# Altium PCB 4501-WB-AV-BMS-REV-A2-ISOSPI.PcbDoc
Units mm, origin at the board's own origin, x right, y up, seen from the top; angles counter-clockwise.
Board outline 100.23 x 71.36 mm, 2 copper layers (Top Layer, Bottom Layer), stack 1.671 mm thick; 95 components, 81 nets, 303 pads, 275 vias.
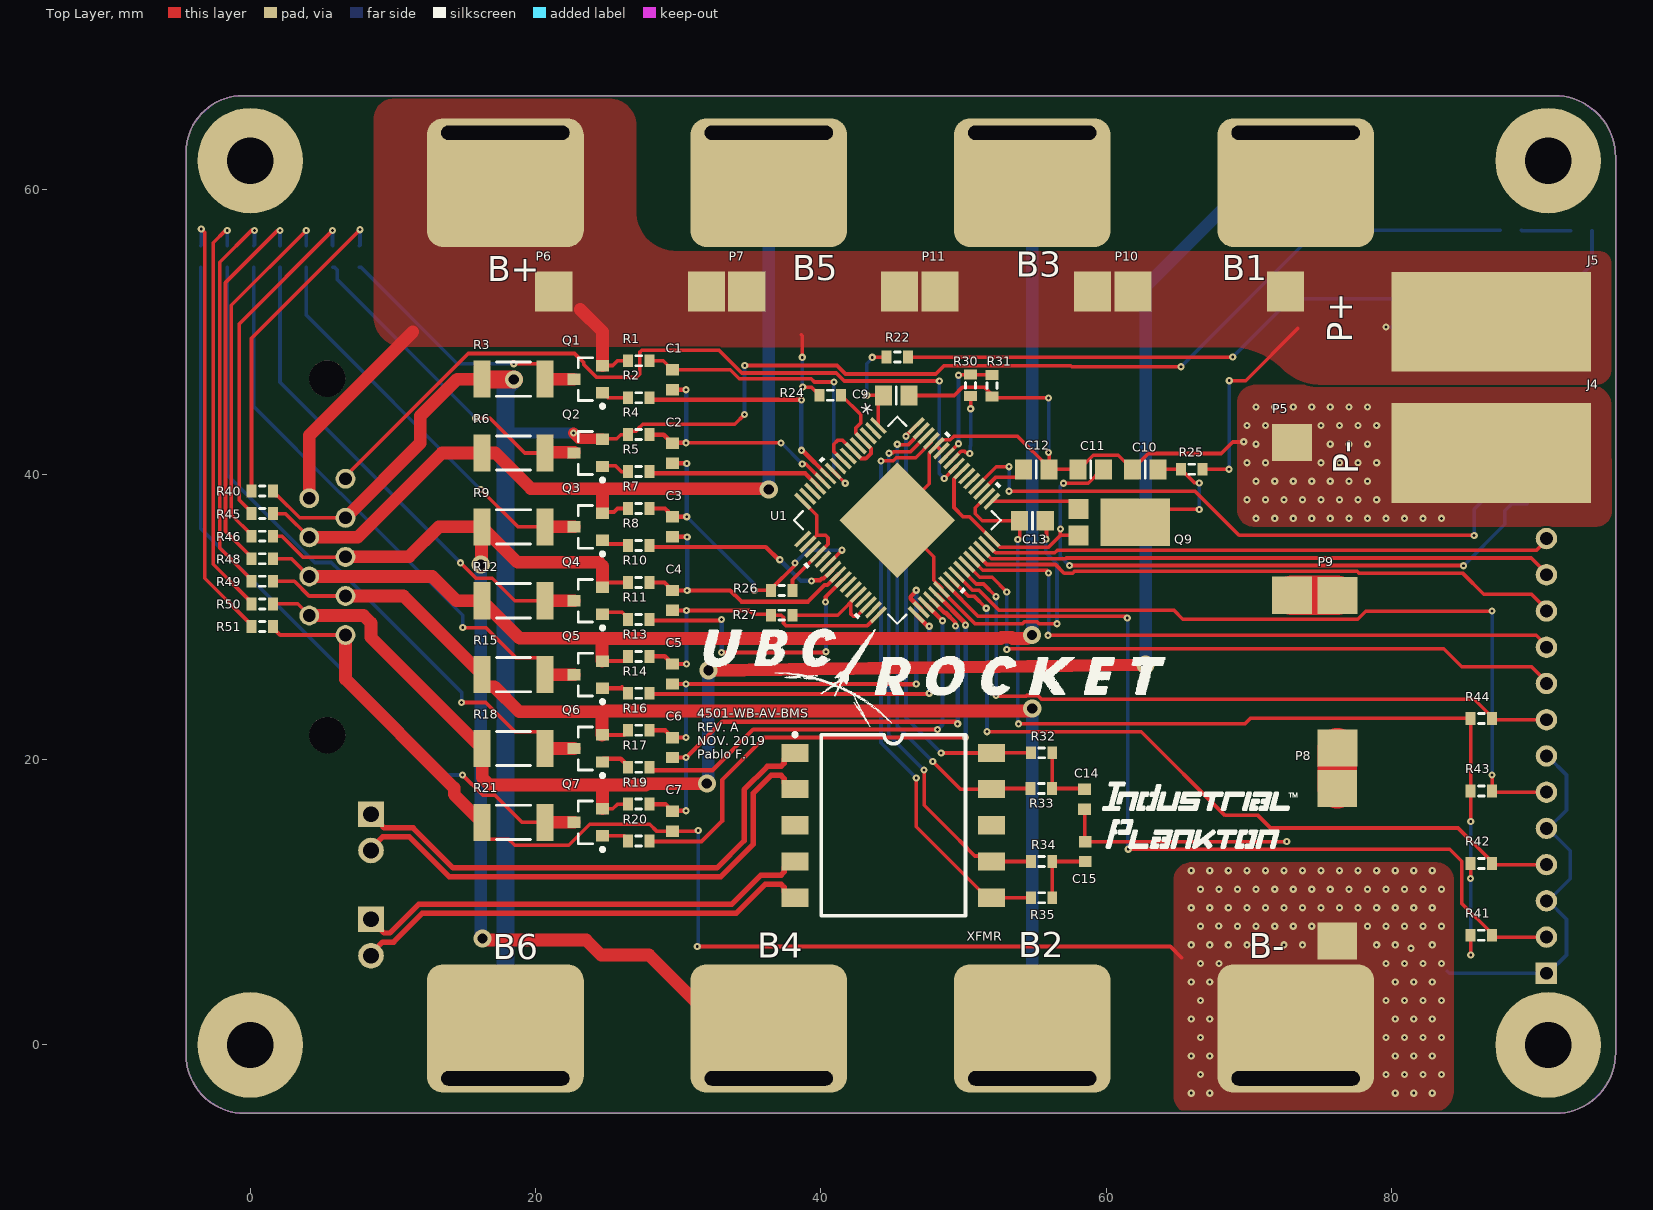
[diagram p0: Top Layer view]
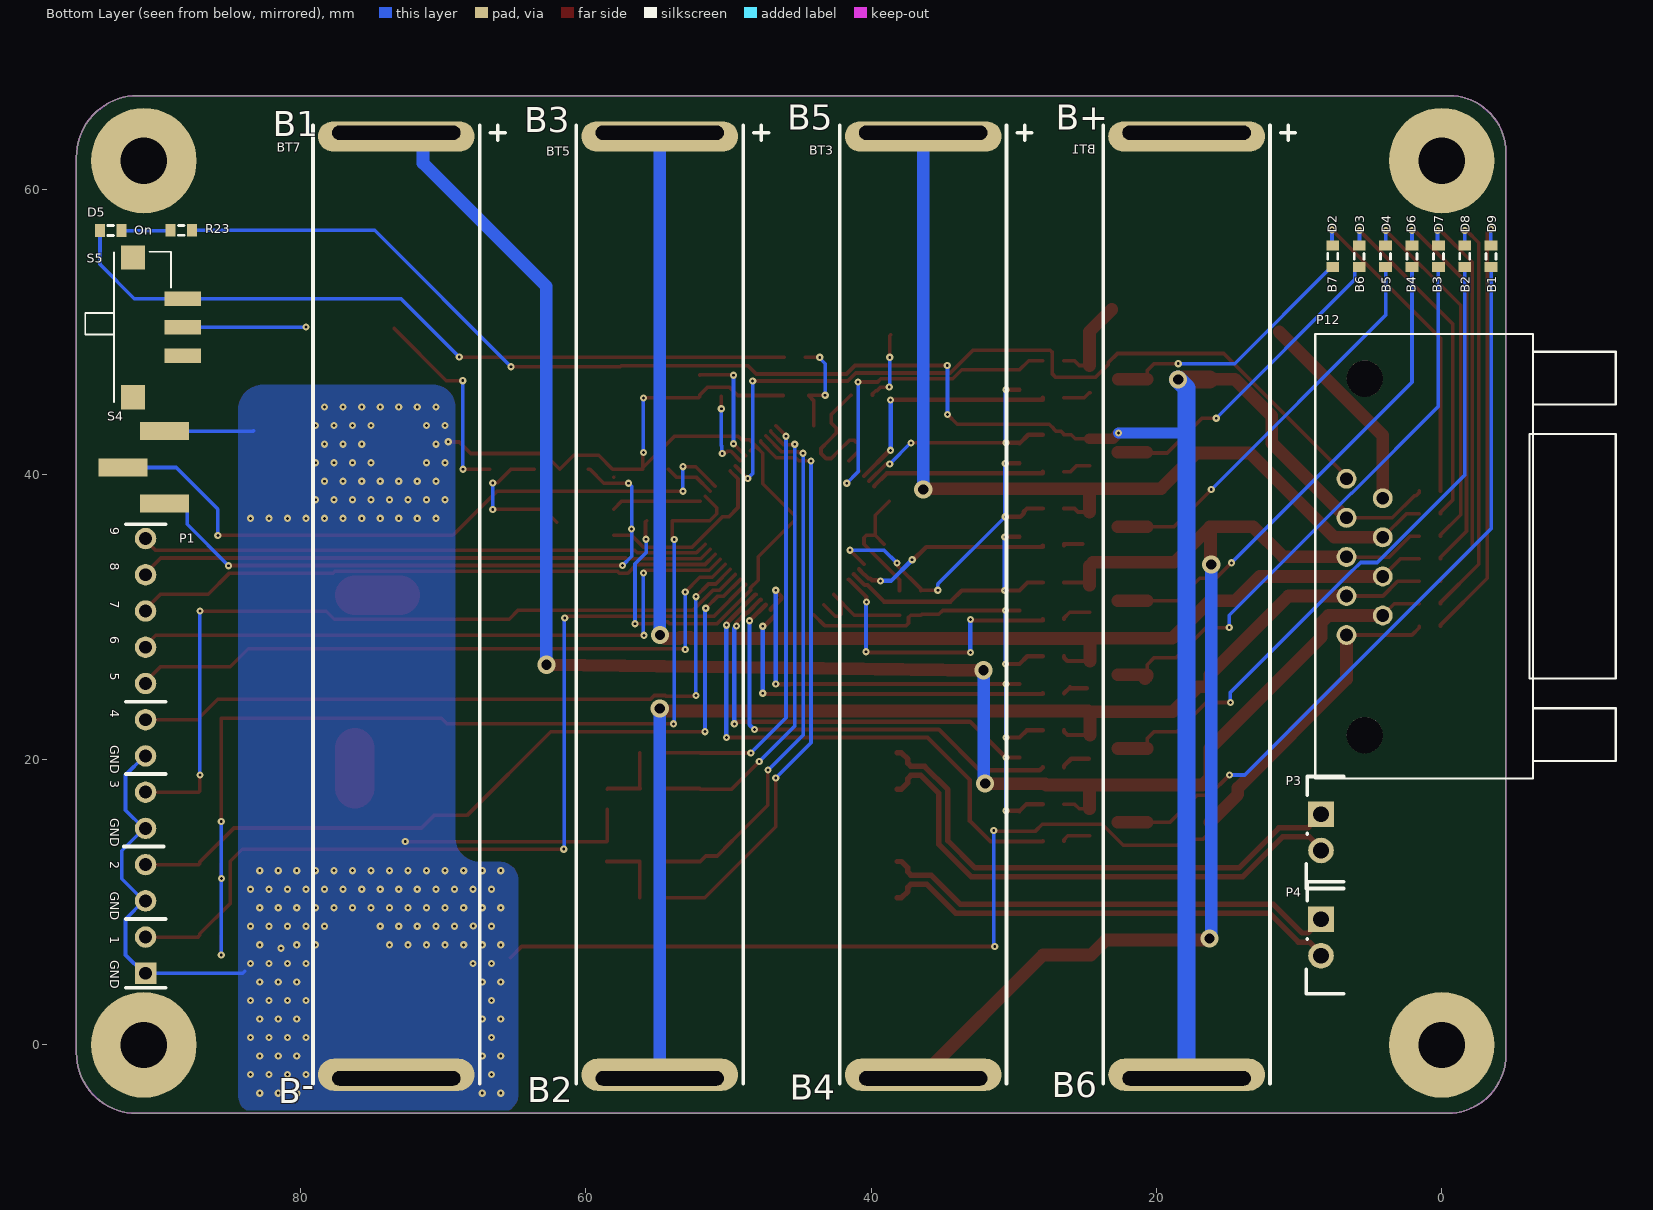
[diagram p1: Bottom Layer view, seen from below]

## Layer stack, top to bottom
Top Solder: solder mask 0.0102, Solder Resist, Dk 3.5
Top Layer: signal copper 0.0356
Dielectric 1: dielectric 1.6, FR-4, Dk 4.8
Bottom Layer: signal copper 0.0356
Bottom Solder: solder mask 0.0102, Solder Resist, Dk 3.5

## Board outline
-0.386,-4.8 91.479,-4.8 ccw(c91.479,-0.551) 95.728,-0.551 95.728,62.238 ccw(c91.401,62.238) 91.401,66.564 -0.49,66.564 ccw(c-0.49,62.555) -4.5,62.555 -4.5,-0.687 ccw(c-0.386,-0.687)

## Design rules (kind name [scope] priority, off if disabled: settings)
Clearance [All] p1: gap=0.152 ignorepadtopadclearanceinfootprint=FALSE except(0: Arc-Hole Track-Hole SMDPad-Hole THPad-Hole Via-Hole Fill-Hole Poly-Hole Region-Hole Text-Hole)
ComponentClearance [All] p1: gap=0 collisioncheckmode=3 verticalgap=0.003 showdistances=FALSE
DiffPairsRouting [All] p1: maxlimit=0.254 minlimit=0.254 mostfreqgap=0.254 toplayer_minwidth=0.381 toplayer_maxwidth=0.381 toplayer_prefwidth=0.381 bottomlayer_minwidth=0.381 bottomlayer_maxwidth=0.381 bottomlayer_prefwidth=0.381 maxuncoupledlength=12.7
HoleSize [All] p1: absolutevalues=TRUE maxlimit=25.4 minlimit=0.025 maxpercent=80.000 minpercent=20.000
HoleToHoleClearance [All] p1: gap=0.2 allowstackedmicrovias=TRUE
MinimumSolderMaskSliver [All] p1: minsoldermaskwidth=0.025
PolygonConnect [All] p1: connectstyle=Direct reliefconductorwidth=0.254 reliefentries=4 polygonreliefangle="90 Angle" airgapwidth=0.254
RoomDefinition 4501-WB-AV-BMS-REV-A2-ISOSPI [InComponentClass('4501-WB-AV-BMS-REV-A2-ISOSPI')] p1: confinementstyle=ConfineIn formatcopy=TRUE lockcomponents=FALSE outline -18.527,-5.045 97.45,-5.045 97.45,69.629 -18.527,69.629
RoutingVias [All] p1: holewidth=0.2 width=0.505 viastyle="Through Hole" minholewidth=0.2 minwidth=0.505 maxholewidth=0.711 maxwidth=1.27
SilkToSilkClearance [All] p1: silktosilkclearance=0.025
SilkToSolderMaskClearance [IsPad] p1: minsilkscreentomaskgap=0.025 clearancetoexposedcopper=TRUE
SolderMaskExpansion [All] p1: expansion=0.102 istentingtop=FALSE
Width [All] p1: maxlimit=2.794 minlimit=0.254 preferedwidth=0.305
23 further rules are at their usual default settings.

## Classes and differential pairs
differential pair IB: +IB_P -IB_N
differential pair IA: +IA_P -IA_N

## Components (designator, comment, footprint, x,y, rotation, side; value= is the part's Value field where it differs from the comment)
BT1 "Battery" PCBComponent_1#1 17.883,-2.342 r90 bottom locked
BT3 "Battery" PCBComponent_1#1 36.354,-2.342 r90 bottom locked
BT5 "Battery" PCBComponent_1#1 54.825,-2.342 r90 bottom locked
BT7 "Battery" PCBComponent_1#1 73.296,-2.342 r90 bottom locked
C1 "399-1092-1-ND" 1608[0603] 29.601,46.632 r90 top value=10nF
C2 "399-1092-1-ND" 1608[0603] 29.601,41.476 r90 top value=10nF
C3 "399-1092-1-ND" 1608[0603] 29.601,36.32 r90 top value=10nF
C4 "399-1092-1-ND" 1608[0603] 29.601,31.164 r90 top value=10nF
C5 "399-1092-1-ND" 1608[0603] 29.601,26.008 r90 top value=10nF
C6 "399-1092-1-ND" 1608[0603] 29.601,20.851 r90 top value=10nF
C7 "399-1092-1-ND" 1608[0603] 29.601,15.695 r90 top value=10nF
C9 "1276-1090-1-ND" 6-0805_N 45.286,45.53 r180 top value=100nF
C10 "1276-1090-1-ND" 6-0805_N 62.744,40.361 r0 top value=100nF
C11 "311-3498-1-ND" 6-0805_N 58.927,40.361 r0 top value=1uF
C12 "311-3498-1-ND" 6-0805_N 55.11,40.361 r180 top value=1uF
C13 "311-3498-1-ND" 6-0805_N 54.836,36.752 r180 top value=1uF
C14 "399-1092-1-ND" 1608[0603] 58.499,17.235 r90 top value=10nF
C15 "399-1092-1-ND" 1608[0603] 58.542,13.561 r270 top value=10nF
D2 "160-1435-1-ND" J1-0603 7.64,55.288 r90 bottom
D3 "160-1435-1-ND" J1-0603 5.79,55.288 r90 bottom
D4 "160-1435-1-ND" J1-0603 3.939,55.288 r90 bottom
D5 "LED0" J1-0603 93.322,57.096 r180 bottom
D6 "160-1435-1-ND" J1-0603 2.088,55.288 r90 bottom
D7 "160-1435-1-ND" J1-0603 0.238,55.288 r90 bottom
D8 "160-1435-1-ND" J1-0603 -1.613,55.288 r90 bottom
D9 "160-1435-1-ND" J1-0603 -3.464,55.288 r90 bottom
J4 "Socket" PCBComponent_1#2 81.712,42.086 r180 top
J5 "Socket" PCBComponent_1#3 81.712,50.699 r180 top
P1 "Header 13" DIP10 90.873,5.024 r0 bottom
P3 "WM4900-ND" WM4900-ND 9.99,8.402 r180 bottom
P4 "WM4900-ND" WM4900-ND 9.99,1.028 r180 bottom
P5 "36-5104-ND" PCBComponent_1#4 73.025,31.53 r90 top
P6 "36-5104-ND" PCBComponent_1#4 31.976,52.825 r180 top
P7 "36-5104-ND" PCBComponent_1#4 45.511,52.825 r180 top
P8 "36-5104-ND" PCBComponent_1#4 76.21,7.279 r90 top
P9 "36-5104-ND" PCBComponent_1#4 76.213,20.817 r90 top
P10 "36-5104-ND" PCBComponent_1#4 72.579,52.825 r180 top
P11 "36-5104-ND" PCBComponent_1#4 59.045,52.825 r180 top
P12 "3-338168-2" CONN_3-338168-2 27.338,39.699 r90 bottom
Q1 "BSS308PEH6327XTSA1CT-ND" SOT95P245X110-3N 23.697,46.682 r180 top
Q2 "BSS308PEH6327XTSA1CT-ND" SOT95P245X110-3N 23.697,41.503 r180 top
Q3 "BSS308PEH6327XTSA1CT-ND" SOT95P245X110-3N 23.697,36.324 r180 top
Q4 "BSS308PEH6327XTSA1CT-ND" SOT95P245X110-3N 23.697,31.145 r180 top
Q5 "BSS308PEH6327XTSA1CT-ND" SOT95P245X110-3N 23.697,25.966 r180 top
Q6 "BSS308PEH6327XTSA1CT-ND" SOT95P245X110-3N 23.697,20.787 r180 top
Q7 "BSS308PEH6327XTSA1CT-ND" SOT95P245X110-3N 23.697,15.608 r180 top
Q9 "DXT5551P5-13CT-ND" DXT5551P5-13 62.042,36.648 r270 top
R1 "A129676CT-ND" J1-0603 27.231,47.97 r0 top value=100
R2 "A129543CT-ND" J1-0603 27.231,45.38 r0 top value=3.3k
R3 "A130642CT-ND" 12Z-2010 18.454,46.682 r180 top value=33
R4 "A129676CT-ND" J1-0603 27.231,42.789 r0 top value=100
R5 "A129543CT-ND" J1-0603 27.231,40.199 r0 top value=3.3k
R6 "A130642CT-ND" 12Z-2010 18.454,41.503 r180 top value=33
R7 "A129676CT-ND" J1-0603 27.231,37.608 r0 top value=100
R8 "A129543CT-ND" J1-0603 27.231,35.018 r0 top value=3.3k
R9 "A130642CT-ND" 12Z-2010 18.454,36.324 r180 top value=33
R10 "A129676CT-ND" J1-0603 27.231,32.427 r0 top value=100
R11 "A129543CT-ND" J1-0603 27.231,29.837 r0 top value=3.3k
R12 "A130642CT-ND" 12Z-2010 18.454,31.145 r180 top value=33
R13 "A129676CT-ND" J1-0603 27.231,27.246 r0 top value=100
R14 "A129543CT-ND" J1-0603 27.231,24.656 r0 top value=3.3k
R15 "A130642CT-ND" 12Z-2010 18.454,25.966 r180 top value=33
R16 "A129676CT-ND" J1-0603 27.231,22.065 r0 top value=100
R17 "A129543CT-ND" J1-0603 27.231,19.475 r0 top value=3.3k
R18 "A130642CT-ND" 12Z-2010 18.454,20.787 r180 top value=33
R19 "A129676CT-ND" J1-0603 27.231,16.884 r0 top value=100
R20 "A129543CT-ND" J1-0603 27.231,14.294 r0 top value=3.3k
R21 "A130642CT-ND" 12Z-2010 18.454,15.608 r180 top value=33
R22 "A129676CT-ND" J1-0603 45.367,48.227 r0 top value=100
R23 "RMCF2010JT33R0CT-ND" J1-0603 88.374,57.113 r180 bottom value=475
R24 "A129676CT-ND" J1-0603 40.663,45.55 r0 top value=100
R25 "A129676CT-ND" J1-0603 66.01,40.361 r0 top value=100
R26 "A129676CT-ND" J1-0603 37.266,31.865 r0 top value=100
R27 "A129676CT-ND" J1-0603 37.266,30.133 r0 top value=100
R30 "RNCP0603FTD1K00CT-ND" J1-0603 50.508,46.244 r90 top value=1k
R31 "RNCP0603FTD1K00CT-ND" J1-0603 52.01,46.223 r270 top value=1k
R32 "311-2598-1-ND" J1-0603 55.477,20.482 r0 top value=50
R33 "311-2598-1-ND" J1-0603 55.462,17.979 r180 top value=50
R34 "311-2598-1-ND" J1-0603 55.477,12.862 r0 top value=50
R35 "311-2598-1-ND" J1-0603 55.477,10.322 r180 top value=50
R40 "RMCF2010JT33R0CT-ND" J1-0603 0.838,38.834 r180 top value=475
R41 "RNCP0603FTD10K0CT-ND" J1-0603 86.316,7.69 r0 top value=10k
R42 "RNCP0603FTD10K0CT-ND" J1-0603 86.316,12.725 r0 top value=10k
R43 "RNCP0603FTD10K0CT-ND" J1-0603 86.316,17.805 r0 top value=10k
R44 "RNCP0603FTD10K0CT-ND" J1-0603 86.316,22.885 r0 top value=10k
R45 "RMCF2010JT33R0CT-ND" J1-0603 0.838,37.252 r180 top value=475
R46 "RMCF2010JT33R0CT-ND" J1-0603 0.838,35.671 r180 top value=475
R48 "RMCF2010JT33R0CT-ND" J1-0603 0.838,34.089 r180 top value=475
R49 "RMCF2010JT33R0CT-ND" J1-0603 0.838,32.507 r180 top value=475
R50 "RMCF2010JT33R0CT-ND" J1-0603 0.838,30.926 r180 top value=475
R51 "RMCF2010JT33R0CT-ND" J1-0603 0.838,29.344 r180 top value=475
S4 "S9337-ND, SAM8981-ND" *TSM-103-01-L-SV 91,40.492 r270 bottom
S5 "SS312SAH4-R" *SW_SS312SAH4-R 89.797,50.315 r180 bottom
U1 "LTC6812ILWE-1#3ZZPBF-ND" "LQFP64_LWE_A - duplicate" 45.367,36.792 r315 top value=Value
XFMR "1840-1032-1-ND" HM2100NLT 38.191,20.482 r0 top

## Footprints (in the part's own frame and the unit in brackets; to place one, negate y for a bottom-side part, rotate by r counter-clockwise, add the part's x,y. Pads: shape width x height; smd on the part's side, far side on the other; paste and mask are expansions set on the pad)
6-0805_N [mm] "Chip Resistor, Body 2.0x1.2mm, IPC Medium Density"
  rect 1.2x1.4 smd: 1(-0.9,0) 2(0.9,0)
  silkscreen extent 0,-0.6 0,0.6, body extent -1.07,-0.7 1.07,0.7, height 0.7
12Z-2010 [mm] "Chip Resistor, Body 5.0x2.5mm, IPC High Density"
  rect 1.2x2.6 smd: 1(-2.2,0) 2(2.2,0)
  silkscreen extent -1.2,-1.2 1.2,1.2, body extent -2.58,-1.33 2.58,1.33, height 0.9
1608[0603] [mm] "Chip Capacitor, Body 1.6x0.8mm, IPC High Density"
  rect 0.8x0.9 smd: 1(-0.7,0) 2(0.7,0)
  body extent -0.87,-0.48 0.87,0.48, height 1.3
*SW_SS312SAH4-R [mm]
  rect 2.55x1 smd: 1(1.525,-2) 2(1.525,0) 3(1.525,2)
  rect 1.7x1.7 smd: P$1(-1.95,-4.9) P$2(-1.95,4.9)
  silkscreen extent -5.3,-5.25 0.7,5.3, body extent -5.27,-5.25 2.12,5.25, height 3.1
*TSM-103-01-L-SV [mm]
  rect 1.27x3.43 smd: 1(-2.54,1.46) 2(0,-1.46) 3(2.54,1.46)
  body extent -3.94,-2.64 3.68,2.64, height 9.78
CONN_3-338168-2 [mil]
  round 55 hole 35: 1(-431.5,-813.39) 2(-377.56,-913.39) 3(-323.62,-813.39) 4(-269.69,-913.39) 5(-215.75,-813.39) 6(-161.81,-913.39) 7(-107.87,-813.39) 8(-53.94,-913.39) 9(0,-813.39)
  round 100 hole 100: 10(-707.75,-863.69) 11(276.25,-863.69)
  silkscreen extent -828,-1556 399,-727, body extent -827,-1569 397,-730, height 67
DIP10 [mm]
  rect 1.5x1.5 hole 0.9: 1(0,0)
  round 1.5 hole 0.9: 2(0,-2.54) 3(0,-5.08) 4(0,-7.62) 5(0,-10.16) 6(0,-12.7) 7(0,-15.24) 8(0,-17.78) 9(0,-20.32) 10(0,-22.86) 11(0,-25.4) 12(0,-27.94) 13(0,-30.48)
  silkscreen extent -1.4,-31.5 1.52,1.02
DXT5551P5-13 [mm]
  rect 1.4x1.39 smd: 1(0.92,-3.982) 2(-0.92,-3.982)
  rect 3.36x4.86 smd: 3(0,0)
HM2100NLT [mm]
  rect 1.89x1.27 smd: 1(0,0) 2(0,-2.54) 3(0,-5.08) 4(0,-7.62) 5(0,-10.16) 6(13.79,0) 7(13.79,-2.54) 8(13.79,-5.08) 9(13.79,-7.62) 10(13.79,-10.16)
  silkscreen extent -0.13,-11.43 11.96,1.4, body extent -0.5,-12.3 14.47,2.4, height 3.3
J1-0603 [mm] "Chip Resistor, Body 1.6x0.8mm, IPC High Density"
  rect 0.7x0.9 smd: 1(-0.75,0) 2(0.75,0)
  silkscreen extent -0.2,-0.35 0.2,0.35, body extent -0.85,-0.48 0.85,0.48, height 0.9
"LQFP64_LWE_A - duplicate" [mm]
  rect 1.461x0.27 smd paste+0 mask+0: 1(-5.625,3.75) 2(-5.625,3.25) 3(-5.625,2.75) 4(-5.625,2.25) 5(-5.625,1.75) 6(-5.625,1.25) 7(-5.625,0.75) 8(-5.625,0.25) 9(-5.625,-0.25) 10(-5.625,-0.75) 11(-5.625,-1.25) 12(-5.625,-1.75) 13(-5.625,-2.25) 14(-5.625,-2.75) 15(-5.625,-3.25) 16(-5.625,-3.75) 33(5.625,-3.75) 34(5.625,-3.25) 35(5.625,-2.75) 36(5.625,-2.25) 37(5.625,-1.75) 38(5.625,-1.25) 39(5.625,-0.75) 40(5.625,-0.25) 41(5.625,0.25) 42(5.625,0.75) 43(5.625,1.25) 44(5.625,1.75) 45(5.625,2.25) 46(5.625,2.75) 47(5.625,3.25) 48(5.625,3.75)
  rect 0.27x1.461 smd paste+0 mask+0: 17(-3.75,-5.625) 18(-3.25,-5.625) 19(-2.75,-5.625) 20(-2.25,-5.625) 21(-1.75,-5.625) 22(-1.25,-5.625) 23(-0.75,-5.625) 24(-0.25,-5.625) 25(0.25,-5.625) 26(0.75,-5.625) 27(1.25,-5.625) 28(1.75,-5.625) 29(2.25,-5.625) 30(2.75,-5.625) 31(3.25,-5.625) 32(3.75,-5.625) 49(3.75,5.625) 50(3.25,5.625) 51(2.75,5.625) 52(2.25,5.625) 53(1.75,5.625) 54(1.25,5.625) 55(0.75,5.625) 56(0.25,5.625) 57(-0.25,5.625) 58(-0.75,5.625) 59(-1.25,5.625) 60(-1.75,5.625) 61(-2.25,5.625) 62(-2.75,5.625) 63(-3.25,5.625) 64(-3.75,5.625)
  rect 5.74x5.74 smd paste-2.857 mask+0: 65(0,0)
  silkscreen extent -6.86,-6.86 6.86,6.86, body extent 0,0 0.25,0.25, height 0.25
PCBComponent_1#1 [mm]
  rrect100% 2.125x11 / inner rrect25% 0x0 / far side rrect0% 0x0 all layers, no hole: 1(66.04,0)
  rrect0% 0x0 / inner rrect0% 0x0 / far side rrect25% 9x11 hole 9 slot 1 at 0 deg copper offset -3.5,0: 1(66.294,0)
  rrect25% 0x0 / inner rrect25% 0x0 / far side rrect25% 9x11 hole 9 slot 1 at 0 deg copper offset 3.5,0: 2(0,0)
  rrect100% 2.25x11 / inner rrect25% 0x0 / far side rrect0% 0x0 all layers, no hole: 2(0.254,0)
  silkscreen extent -0.38,-7.62 66.8,5.84, body extent 0.63,-9.2 65.63,9.2, height 18.6
PCBComponent_1#2 [mm]
  rect 14x7 smd: 1(-5.288,0.586)
PCBComponent_1#3 [mm]
  rect 14x7 smd: 1(-5.288,0)
PCBComponent_1#4 [mm]
  rect 2.6x2.8 smd: 1(0,0) 2(10.7,0)
  body extent -0.94,-1.15 11.36,1.15, height 1.8
SOT95P245X110-3N [mm] "SOT23, 3-Leads, Body 2.90x2.45mm, Pitch 0.95mm, IPC Medium Density"
  rect 0.9x0.8 smd: 1(-1,0.95) 2(-1,-0.95) 3(1,0)
  silkscreen extent -1.13,-1.5 0.7,2.02, body extent -0.7,-1.5 0.7,1.5, height 1.1
WM4900-ND [mm]
  rect 1.79x1.79 hole 1.09: 1(1.524,7.772)
  round 1.79 hole 1.09: 2(1.524,5.232)
  silkscreen extent 0.48,2.57 3.1,10.42, body extent 0.89,2.84 14.48,10.21, height 7.11

## Part data
BT1 BT3 BT5 BT7: "Multicell Battery", LatestRevisionDate=17-Jul-2002, LatestRevisionNote="Re-released for DXP Platform.", PackageDescription="Battery; 2 Leads", PackageReference=BAT-2, Published=24-Mar-1999, Publisher="Altium Limited"
C1 C2 C3 C4 C5 C6 C7 C9 C10 C11 C12 C13 C14 C15: library part "Cap Semi", "Capacitor (Semiconductor SIM Model)", LatestRevisionDate=29-May-2009, LatestRevisionNote="IPC-7351 Footprint Added.", PackageDescription="Chip Capacitor", PackageReference=C1206, Published=8-Jun-2000, Publisher="Altium Limited"
  C1 C2 C3 C4 C5 C6 C7 C14 C15: SPN=399-1092-1-ND
  C9 C10: SPN=1276-1090-1-ND
  C11 C12 C13: SPN=311-3498-1-ND
D2 D3 D4 D6 D7 D8 D9: library part LED0, "Typical INFRARED GaAs LED", LatestRevisionDate=08-Jul-2005, LatestRevisionNote="Mech Layer 1 removed.", PackageDescription="LED; 2 Leads", PackageReference=LED-0, Published=8-Jun-2000, Publisher="Altium Limited", SPN=160-1435-1-ND
D5: "Typical INFRARED GaAs LED", LatestRevisionDate=08-Jul-2005, LatestRevisionNote="Mech Layer 1 removed.", PackageDescription="LED; 2 Leads", PackageReference=LED-0, Published=8-Jun-2000, Publisher="Altium Limited", SPN=160-1646-1-ND
P1: "Header, 13-Pin", LatestRevisionDate=17-Jul-2002, LatestRevisionNote="Re-released for DXP Platform.", Publisher="Altium Limited"
P3 P4 P5 P6 P7 P8 P9 P10 P11: library part "Header 2", "Header, 2-Pin", LatestRevisionDate=17-Jul-2002, LatestRevisionNote="Re-released for DXP Platform.", Publisher="Altium Limited"
  P3 P4: SPN=WM4900-ND
  P5 P6 P7 P8 P9 P10 P11: SPN=36-5104-ND
P12: library part "Header 9", "Header, 9-Pin", Supplier Part Number 1=A105035-ND, LatestRevisionDate=17-Jul-2002, LatestRevisionNote="Re-released for DXP Platform.", MPN=3-338168-2, Publisher="Altium Limited", SPN=A105035-ND, Supplier 1=Digi-Key
Q1 Q2 Q3 Q4 Q5 Q6 Q7: library part MOSFET-P, "P-Channel MOSFET", LatestRevisionDate=17-Jul-2002, LatestRevisionNote="Re-released for DXP Platform.", PackageDescription="TO, Flat Index; 3 In-Line, Axial Leads; Body Dia. 4.6mm; Lead Dia. 0.5 mm (max)", PackageReference=E3, PackageVersion=1995/1996, Published=8-Jun-2000, Publisher="Altium Limited", SPN=BSS308PEH6327XTSA1CT-ND
Q9: library part 2N3904, "NPN General Purpose Amplifier", ComponentLink1Description="Manufacturer Link", ComponentLink1URL=http://www.fairchildsemi.com/, ComponentLink2Description=Datasheet, ComponentLink2URL=http://www.fairchildsemi.com/ds/2N%2F2N3904.pdf, DatasheetVersion=1997, LatestRevisionDate=15-Jan-2003, LatestRevisionNote="PCB Footprint 'BCY-W3/D4.7' replaced", PackageDescription="TO, Flat Index; 3 In-Line, Axial Leads; Body Dia. 4.5mm; Leads 0.51 x 0.48 mm (max)", PackageReference=TO-92A, PackageVersion=Sep-1998, Published=8-Jun-2000, Publisher="Altium Limited", SPN=DXT5551P5-13CT-ND
R1 R2 R3 R4 R5 R6 R7 R8 R9 R10 R11 R12 R13 R14 R15 R16 R17 R18 R19 R20 R21 R22 R23 R24 R25 R26 R27 R30 R31 R32 R33 R34 R35 R40 R41 R42 R43 R44 R45 R46 R48 R49 R50 R51: library part Res3, "Resistor", LatestRevisionDate=29-May-2009, LatestRevisionNote="IPC-7351 Footprint Added.", PackageDescription="Chip Resistor", PackageReference=J1-0603, Published=8-Jun-2000, Publisher="Altium Limited"
  R1 R4 R7 R10 R13 R16 R19 R22 R24 R25 R27: Parameter 1=A129676CT-ND, SPN=A129676CT-ND
  R2 R5 R8 R11 R14 R17 R20: SPN=A129543CT-ND
  R3 R6 R9 R12 R15 R18 R21: SPN=A130642CT-ND
  R23 R40 R45 R46 R48 R49 R50 R51: SPN=RMCF2010JT33R0CT-ND
  R26: SPN=A129676CT-ND
  R30 R31: SPN=RNCP0603FTD1K00CT-ND
  R32 R33 R34 R35: SPN=311-2598-1-ND
  R41 R42 R43 R44: SPN=RNCP0603FTD10K0CT-ND
S4: library part SW-SPDT, "SPDT Subminiature Toggle Switch, Right Angle Mounting, Vertical Actuation", ComponentLink1Description="Manufacturer Link", ComponentLink1URL=http://www.apem.com, DatasheetVersion=05-Dec-2000, LatestRevisionDate=17-Dec-2003, LatestRevisionNote="Schematic revised, PCB Footprint replaced.", PackageDescription="Switch; 4 Leads", PackageReference=TL36WW15050, Published=24-Mar-1999, Publisher="Altium Limited", SPN="S9337-ND, SAM8981-ND"
S5: "Switch Slide ON None ON SPDT Side Slide 0.1A 28VAC 28VDC 0.4VA 10000Cycles Gull Wing SMD T/R", Package=None, Availability=Unavailable, MF="NKK Switches", MP=SS312SAH4-R, Price=None, SnapEDA_Link=https://www.snapeda.com/parts/SS312SAH4-R/NKK%20Switches/view-part/?ref=snap, SPN=‎360-2924-1-ND‎
U1: library part LTC6812HLWE-1, "No Description Available", Copyright="Copyright (C) 2018 Accelerated Designs. All rights reserved", RefDes=RefDes, SPN=LTC6812ILWE-1#3ZZPBF-ND, Type=DEV
XFMR: library part "Header 5X2A", "Header, 5-Pin, Dual row / HM2100NLT", LatestRevisionDate=17-Jul-2002, LatestRevisionNote="Re-released for DXP Platform.", Publisher="Altium Limited", SPN=1840-1032-1-ND
J4 J5: LatestRevisionDate=17-Jul-2002, LatestRevisionNote="Re-released for DXP Platform.", Publisher="Altium Limited"

## Free pads (board coordinates)
  round 7.4 hole 3.251: 1(0,0) 1(0,62) 1(91,0) 1(91,62)

## Via types
v1: diameter 0.505, hole 0.2, Top Layer to Bottom Layer, tented both sides, 266 vias
v2: diameter 1.27, hole 0.711, Top Layer to Bottom Layer, tented both sides, 9 vias

## Nets (pads, with @x,y where several pads share a name; then routed paths per layer and width w, separated by ;. In a path a pad name is that pad's centre, name@x,y a point inside that pad or via, vN(x,y) a via of type N, cw(c..) or ccw(c..) an arc to the next point about the centre after c; other vN are vias at no path point)
C1: C6.1 C7.2 R19.2 U1.36 | length 37.1
  Top Layer w0.305: R19.2 29.112,16.884 C7.2 29.627,16.421 v1(30.552,16.421) ; C6.1 30.564,20.151 33.083,22.67 49.441,22.67 v1(49.596,22.515) ; U1.36 48.681,30.296 48.763,30.296 49.437,29.622 v1(49.437,29.375)
  Bottom Layer w0.305: v1(30.552,16.421) v1(30.552,20.151) ; v1(49.437,29.375) 49.596,29.216 v1(49.596,22.515)
C2: C5.1 C6.2 R16.2 U1.34 | length 32
  Top Layer w0.305: R16.2 29.087,22.065 C6.2 30.543,21.551 v1(30.553,21.561) ; C5.1 v1(30.553,25.308) 45.707,25.308 45.717,25.297 v1(46.693,25.297) ; v1(46.692,31.877) 46.692,31.823 46.305,31.436 46.305,31.283 47.046,30.542 U1.34
  Bottom Layer w0.305: v1(30.553,21.561) v1(30.553,25.308) ; v1(46.692,31.877) 46.692,25.298 v1(46.693,25.297)
C3: C4.1 C5.2 R13.2 R27.1 U1.32 | length 22
  Top Layer w0.254: C4.1 29.606,30.459 v1(30.586,30.459) 34.992,30.459 35.255,30.195 36.454,30.195 R27.1 37.238,30.133 37.387,29.984 37.387,29.567 37.55,29.403 43.27,29.403 44.03,30.163 U1.32
  Top Layer w0.305: R13.2 29.062,27.246 C5.2 v1(30.586,26.708)
  Bottom Layer w0.305: v1(30.586,26.708) v1(30.586,30.459)
C6: C3.1 C4.2 R10.2 U1.24 | length 19.4
  Top Layer w0.305: R10.2 29.038,32.427 C4.2 v1@30.626,31.864 ; C3.1 v1(30.631,35.62) ; v1@30.61,31.847 v1@30.626,31.864 ; v1(30.631,31.868) v1@30.626,31.864 ; U1.24 40.464,32.243 40.259,32.243 39.098,31.083 34.438,31.083 33.656,31.864 v1@30.626,31.864
  Bottom Layer w0.305: v1(30.631,31.868) v1(30.631,35.62)
C7: C2.1 C3.2 R7.2 R26.1 U1.22 | length 23.7
  Top Layer w0.254: v1(35.329,31.877) 36.504,31.877 R26.1 36.516,31.965 38.191,33.64 38.191,33.727 38.199,33.735 v1(38.199,33.789) ; U1.22 40.506,33.706 41.483,34.684 v1(41.483,34.691)
  Top Layer w0.305: R7.2 27.982,37.609 29.076,37.609 29.304,37.382 29.304,37.268 29.551,37.02 C3.2 29.602,37.021 30.587,37.021 v1(30.603,37.037) v1@30.62,37.021 ; C2.1 v1(30.603,40.776)
  Bottom Layer w0.254: v1(30.603,37.037) 35.329,32.312 v1(35.329,31.877) ; v1(38.199,33.789) 39.101,34.691 v1(41.483,34.691)
  Bottom Layer w0.305: v1(30.603,37.037) v1(30.603,40.776)
C11: C1.1 C2.2 R4.2 U1.12 | length 18.2
  Top Layer w0.254: v1(30.556,42.215) 37.216,42.215 v1(37.219,42.213) ; v1(38.699,40.732) 38.953,40.732 U1.12
  Top Layer w0.305: R4.2 28.988,42.789 C2.2 29.64,42.215 v1(30.556,42.215) ; C1.1 30.555,45.932 v1(30.556,45.931)
  Bottom Layer w0.254: v1(37.219,42.213) v1(38.699,40.732)
  Bottom Layer w0.305: v1(30.556,42.215) v1(30.556,45.931)
C12: C1.2 R1.2 U1.10 | length 22.2
  Top Layer w0.254: R1.2 28.963,47.97 C1.2 33.654,47.332 34.285,46.702 39.336,46.702 39.558,46.48 v1(40.92,46.48) ; U1.10 40.863,40.24 v1(41.717,39.386)
  Bottom Layer w0.254: v1(40.92,46.48) 40.92,40.183 v1(41.717,39.386)
Cell1: BT7.1 P12.2 Q7.2 R18.2 R19.1 R50.1 | length 122
  Top Layer w0.254: R50.1 3.321,30.926 P12.2 ; 24.67,18.225 24.697,18.198 ; Q7.2 25.42,16.558 25.746,16.884 R19.1
  Top Layer w0.305: 25.433,18.225 25.446,18.212
  Top Layer w0.889: P12.2 7.945,30.109 8.466,29.588 8.466,28.576 R18.2 16.254,18.746 16.775,18.225 24.67,18.225 25.433,18.225 27.722,18.225 27.818,18.321 v2(32.009,18.321) ; Q7.2 24.697,18.198 ; v2(32.116,26.274) 32.134,26.257 v2(62.772,26.658)
  Bottom Layer w0.889: v2(32.009,18.321) 32.009,18.383 32.116,18.489 v2(32.116,26.274) ; v2(62.772,26.658) 62.772,53.175 71.42,61.823 71.42,63.127 71.991,63.698 BT7.1@73.296,63.698
Cell2: BT5.2 P12.3 Q6.2 R15.2 R16.1 R49.1 | length 87.1
  Top Layer w0.254: R49.1 3.096,32.507 4.125,31.479 P12.3 ; v2(54.825,23.591) v2@54.946,23.712
  Top Layer w0.305: Q6.2@24.66,21.728 26.244,21.728 26.481,21.965 R16.1 ; 24.66,23.293 24.732,23.366
  Top Layer w0.889: P12.3 6.68,31.48 10.74,31.48 R15.2 16.254,25.266 16.41,25.111 17.11,25.111 18.855,23.366 24.732,23.366 24.786,23.419 54.653,23.419 v2(54.825,23.591) ; Q6.2@24.66,21.728 24.66,23.293
  Bottom Layer w0.889: BT5.2@54.825,-2.088 v2(54.825,23.591)
Cell3: BT5.1 P12.4 Q5.2 R12.2 R13.1 R48.1 | length 94.1
  Top Layer w0.254: R48.1 2.897,34.089 P12.4
  Top Layer w0.305: 24.66,28.465 24.699,28.504 ; Q5.2@24.881,26.916 26.251,26.916 26.481,27.146 R13.1
  Top Layer w0.889: P12.4 12.763,32.849 14.466,31.145 R12.2 18.895,28.504 24.699,28.504 24.7,28.503 52.607,28.503 52.681,28.577 53.384,28.577 53.458,28.503 54.455,28.503 54.697,28.746 v2(54.8,28.746) ; Q5.2@24.66,26.916 24.66,28.465
  Bottom Layer w0.254: 54.825,46.521 54.837,46.508
  Bottom Layer w0.889: v2(54.8,28.746) 54.8,28.903 54.825,28.927 54.825,46.521 BT5.1@54.825,63.698
Cell4: BT3.2 P12.5 Q4.2 R9.2 R10.1 R46.1 | length 81.9
  Top Layer w0.254: R46.1 2.226,35.671 3.691,34.206 6.665,34.206 P12.5 ; Q4.2@24.697,32.233 24.892,32.427 25.57,32.427
  Top Layer w0.305: 25.57,32.427 R10.1
  Top Layer w0.889: P12.5 6.693,34.234 11.125,34.234 13.216,36.324 R9.2 ; v2(16.16,33.68) 16.207,33.727 16.207,36.277 R9.2 ; v2(16.281,7.471) 16.388,7.364 23.547,7.364 24.601,6.31 27.956,6.31 BT3.2@36.354,-2.088 ; Q4.2@24.697,32.233 24.697,33.584 24.447,33.833 18.745,33.833 R9.2
  Bottom Layer w0.889: v2(16.16,33.68) 16.158,33.678 16.158,7.594 v2(16.281,7.471)
Cell5: BT3.1 P12.6 Q3.2 R6.2 R7.1 R45.1 | length 67.4
  Top Layer w0.254: R45.1 2.474,37.252 P12.6 ; 24.66,39.002 24.697,38.965 ; Q3.2@24.697,37.366 25.504,37.366 25.746,37.608 R7.1
  Top Layer w0.889: P12.6 7.533,35.589 13.448,41.503 R6.2 17.181,41.503 19.682,39.002 24.66,39.002 36.287,39.002 v2(36.354,38.935) ; Q3.2@24.697,37.366 24.697,38.965
  Bottom Layer w0.254: 36.354,48.786 36.417,48.723
  Bottom Layer w0.889: v2(36.354,38.935) 36.354,48.786 BT3.1@36.354,63.698
Cell6: BT1.2 P12.7 Q2.2 R3.2 R4.1 R23.2 R40.1 | length 150.8
  Top Layer w0.254: R40.1 1.587,38.734 1.811,38.511 1.911,38.511 3.463,36.959 P12.7 ; Q2.2@24.697,42.499 25.693,42.499 25.983,42.789 R4.1 26.481,42.817 26.704,43.04 27.062,43.04 27.21,43.189 27.21,43.213 27.516,43.519 33.971,43.519 v1(34.653,44.201) ; v1(34.674,47.64) 34.681,47.632 41.144,47.632 41.733,47.043 48.052,47.043 48.632,47.623 57.525,47.623 57.597,47.551 v1(65.248,47.551)
  Top Layer w0.762: v1(22.66,42.899) 23.059,42.499 Q2.2@24.697,42.499
  Top Layer w0.889: P12.7 11.922,42.203 11.922,44.091 14.514,46.682 R3.2
  Top Layer w1.27: R3.2@16.271,46.665 v2(18.479,46.665)
  Bottom Layer w0.254: 17.883,42.574 17.903,42.554 ; 17.883,43.459 18.443,42.899 ; v2@18.402,46.742 v2(18.479,46.665) ; v1(34.653,44.201) 34.653,47.62 v1(34.674,47.64) ; v1(65.248,47.551) 74.81,57.113 R23.2
  Bottom Layer w0.762: 18.443,42.899 v1(22.66,42.899)
  Bottom Layer w1.27: BT1.2@17.883,-2.088 17.883,42.574 17.883,43.459 17.883,46.07 v2(18.479,46.665)
CS: R35.2 U1.61 XFMR.10 | length 40.9
  Top Layer w0.254: v1(44.224,40.932) 44.248,40.956 45.077,40.956 45.294,41.173 46.656,41.173 47.753,42.271 U1.61 ; v1(46.692,18.718) 46.692,15.302 51.671,10.322 XFMR.10 R35.2
  Bottom Layer w0.254: v1(44.224,40.932) 44.224,21.186 v1(46.692,18.718)
DRIVE: Q9.2 U1.49 | length 6.3
  Top Layer w0.254: U1.49 57.509,38.118 Q9.2
GND: BT7.2 C7.1 C9.1 C10.1 C11.1 C12.1 C13.1 C14.1 C15.1 J4.1 P1.1 P1.3 P1.5 P1.7 P5.2 P8.1 P12.1 R21.2 R31.2 R51.1 S4.1 U1.38 U1.59 U1.60 U1.65 | length 200
  Top Layer w0.254: R51.1 1.587,29.244 2.093,28.739 P12.1 ; R21.2 16.254,14.908 16.727,14.435 18.094,14.435 18.537,13.993 22.327,13.993 23.804,15.47 28,15.47 28.475,14.995 C7.1 31.375,14.995 v1(31.407,15.027) ; v1(31.336,6.902) 64.512,6.902 65.292,6.121 ; C9.1 49.349,45.53 49.942,46.123 51.469,46.123 52.01,45.582 R31.2 52.118,45.365 v1(55.974,45.365) ; U1.59 U1.60 ; C13.1 55.827,36.661 55.827,35.502 v1(55.781,35.456) ; v1(55.974,41.532) 56.01,41.496 C12.1@56.01,40.461 ; v1(56.557,29.535) 55.305,29.535 55.179,29.66 54.264,29.66 54.139,29.535 50.806,29.535 48.461,31.88 U1.38 48.461,32.052 47.923,32.59 47.923,34.237 U1.65 45.367,37.113 47.604,39.35 47.604,41.493 48.107,41.996 U1.60 ; C14.1 58.499,14.304 C15.1 72.666,14.261 v1(72.667,14.259) ; v1(69.656,42.289) 69.64,42.274 68.88,42.274 68.075,41.469 62.951,41.469 C10.1 60.864,41.341 59.111,41.341 58.132,40.361 C11.1 C12.1 C12.1@56.01,40.461 ; U1.60 48.528,42.429 49.083,42.429 49.333,42.679 53.793,42.679 C12.1@56.01,40.461
  Top Layer w0.889: P12.1 6.678,25.644 14.295,18.027 14.295,17.567 R21.2
  Bottom Layer w0.254: v1(31.336,6.902) 31.407,6.973 v1(31.407,15.027) ; v1(55.781,35.456) 55.781,34.522 56.558,33.745 v1@56.558,29.538 ; v1(55.974,41.532) v1(55.974,45.365) ; v1(56.557,29.535) v1@56.557,29.538 ; 83.307,43.06 83.335,43.032 S4.1 ; 83.919,5.166 84.061,5.024 91,5.024 92.281,6.305 92.281,8.823 91,10.104 92.547,11.651 92.547,13.617 91,15.164 91,15.184 92.281,16.465 92.281,18.933 91,20.213 P1.7@91,20.264
  other v1: 65.972,-3.379 67.272,-3.379 80.272,-3.379 81.572,-3.379 82.872,-3.379 66.622,-2.079 79.622,-2.079 80.922,-2.079 82.222,-2.079 83.522,-2.079 65.972,-0.779 67.272,-0.779 80.272,-0.779 81.572,-0.779 82.872,-0.779 66.622,0.521 79.622,0.521 80.922,0.521 82.222,0.521 83.522,0.521 65.972,1.821 67.272,1.821 80.272,1.821 81.572,1.821 82.872,1.821 66.622,3.121 79.622,3.121 80.922,3.121 82.222,3.121 83.522,3.121 65.972,4.421 67.272,4.421 80.272,4.421 81.572,4.421 82.872,4.421 66.622,5.721 67.922,5.721 79.622,5.721 80.922,5.721 82.222,5.721 83.522,5.721 81.379,6.782 65.972,7.021 67.272,7.021 68.572,7.021 69.872,7.021 71.172,7.021 72.472,7.021 73.772,7.021 78.972,7.021 80.272,7.021 82.872,7.021 66.622,8.321 69.222,8.321 70.522,8.321 71.822,8.321 73.122,8.321 74.422,8.321 78.322,8.321 79.622,8.321 80.922,8.321 82.222,8.321 83.522,8.321 67.897,8.347 65.972,9.621 67.272,9.621 68.572,9.621 69.872,9.621 71.172,9.621 72.472,9.621 73.772,9.621 75.072,9.621 76.372,9.621 77.672,9.621 78.972,9.621 80.272,9.621 81.572,9.621 82.872,9.621 66.622,10.921 67.922,10.921 69.222,10.921 70.522,10.921 71.822,10.921 73.122,10.921 74.422,10.921 75.722,10.921 77.022,10.921 78.322,10.921 79.622,10.921 80.922,10.921 82.222,10.921 83.522,10.921 65.972,12.221 67.272,12.221 68.572,12.221 69.872,12.221 71.172,12.221 72.472,12.221 73.772,12.221 75.072,12.221 76.372,12.221 77.672,12.221 78.972,12.221 80.272,12.221 81.572,12.221 82.872,12.221 70.522,36.921 71.822,36.921 73.122,36.921 74.422,36.921 75.722,36.921 77.022,36.921 78.322,36.921 79.622,36.921 80.922,36.921 82.222,36.921 83.522,36.921 69.872,38.221 71.172,38.221 72.472,38.221 73.772,38.221 75.072,38.221 76.372,38.221 77.672,38.221 78.972,38.221 70.522,39.521 71.822,39.521 73.122,39.521 74.422,39.521 75.722,39.521 77.022,39.521 78.322,39.521 69.872,40.821 71.172,40.821 75.072,40.821 76.372,40.821 77.672,40.821 78.972,40.821 70.522,42.121 75.722,42.121 77.022,42.121 78.322,42.121 69.872,43.421 71.172,43.421 75.072,43.421 76.372,43.421 77.672,43.421 78.972,43.421 70.522,44.721 71.822,44.721 73.122,44.721 74.422,44.721 75.722,44.721 77.022,44.721 78.322,44.721
GPIO1: P1.2 R41.2 U1.39 | length 63.7
  Top Layer w0.254: U1.39 48.814,32.279 51.026,30.067 61.363,30.067 61.481,29.949 v1(61.481,29.941) ; v1(61.56,13.728) 84.087,13.728 84.937,12.878 84.937,9.919 87.066,7.79 R41.2 87.192,7.564 P1.2@91,7.564
  Bottom Layer w0.254: v1(61.481,29.941) 61.509,29.913 v1@61.509,13.728 ; v1@61.509,13.728 v1(61.56,13.728)
GPIO2: P1.4 R42.2 U1.40 | length 55.2
  Top Layer w0.254: U1.40 50.335,31.471 50.744,31.471 v1(51.598,30.618) ; v1(51.654,21.965) 62.472,21.965 68.344,16.093 70.654,16.093 71.532,15.215 84.676,15.215 87.066,12.825 R42.2 87.147,12.644 P1.4@91,12.644
  Bottom Layer w0.254: v1(51.598,30.618) 51.654,30.562 v1(51.654,21.965)
GPIO3: P1.6 R43.2 U1.41 | length 55.7
  Top Layer w0.254: U1.41 50.635,31.878 51.09,31.878 52.494,30.473 64.759,30.473 65.379,29.853 77.644,29.853 78.207,30.416 v1(87.066,30.416) ; v1(87.066,18.933) R43.2 87.147,17.724 P1.6@91,17.724
  Bottom Layer w0.254: v1(87.066,18.933) v1(87.066,30.416)
GPIO4: P1.8 R44.2 U1.42 | length 49.7
  Top Layer w0.254: U1.42 50.901,32.32 51.405,32.32 v1(52.294,31.431) ; v1(52.288,24.496) 52.343,24.442 54.383,24.442 54.446,24.505 55.203,24.505 55.477,24.231 85.82,24.231 87.066,22.985 R44.2 87.147,22.804 P1.8@91,22.804
  Bottom Layer w0.254: v1(52.288,24.496) 52.294,24.501 v1(52.294,31.431)
GPIO5: P1.9 U1.43 | length 46.6
  Top Layer w0.254: U1.43 51.143,32.784 52.012,32.784 v1(53.033,31.763) ; v1(53.033,27.727) 53.076,27.77 83.685,27.77 84.935,26.52 89.824,26.52 P1.9@91,25.344
  Bottom Layer w0.254: v1(53.033,27.727) v1(53.033,31.763)
GPIO6: P1.10 U1.44 | length 45.6
  Top Layer w0.254: U1.44 51.353,33.281 55.875,33.281 55.969,33.188 v1(55.969,33.099) ; v1(55.937,28.72) 90.164,28.72 P1.10@91,27.884
  Bottom Layer w0.254: v1(55.937,28.72) 55.969,28.752 v1(55.969,33.099)
GPIO7: P1.11 U1.45 | length 41.8
  Top Layer w0.254: U1.45 51.654,33.688 56.45,33.688 57.057,33.081 57.66,33.081 57.785,33.206 77.619,33.206 77.766,33.059 85.03,33.059 86.488,31.6 89.824,31.6 P1.11@91,30.424
GPIO8: P1.12 U1.46 | length 40.5
  Top Layer w0.254: U1.46 51.954,34.094 57.169,34.094 57.219,34.144 89.82,34.144 P1.12@91,32.964
GPIO9: P1.13 U1.47 | length 40
  Top Layer w0.254: U1.47 52.255,34.5 56.411,34.5 56.599,34.688 90.184,34.688 P1.13@91,35.504
IA_N: P4.1 XFMR.4 | length 32.4
  Top Layer w0.381: P4.1 9.17,8.096 9.17,8.072 9.394,7.848 9.788,7.848 11.795,9.855 33.748,9.855 35.803,11.91 37.214,11.91 37.437,12.133 37.437,12.418 37.881,12.862 XFMR.4
IA_P: P4.2 XFMR.5 | length 32.4
  Top Layer w0.381: P4.2 8.466,6.408 9.272,7.213 10.051,7.213 12.058,9.22 34.063,9.22 36.117,11.275 37.214,11.275 37.437,11.052 37.437,10.767 37.881,10.322 XFMR.5
IB_N: P3.2 XFMR.2 | length 37
  Top Layer w0.381: P3.2 8.466,13.781 9.272,14.587 11.16,14.587 13.964,11.783 32.983,11.783 35.255,14.055 35.255,17.634 36.516,18.895 37.214,18.895 37.437,18.672 37.437,18.387 37.881,17.942 XFMR.2
IB_P: P3.1 XFMR.1 | length 36.9
  Top Layer w0.381: P3.1 9.17,15.47 9.17,15.445 9.394,15.222 11.423,15.222 14.227,12.418 32.72,12.418 34.62,14.318 34.62,17.897 36.253,19.53 37.214,19.53 37.437,19.753 37.437,20.038 37.881,20.482 XFMR.1
NetC9_2: C9.2 R22.1 U1.1 | length 7.2
  Top Layer w0.254: v1(43.228,45.553) 44.363,45.553 C9.2 44.041,45.186 U1.1 ; v1(43.604,48.209) 43.622,48.227 R22.1
  Bottom Layer w0.254: v1(43.228,45.553) 43.228,47.765 43.604,48.141 v1(43.604,48.209)
NetC10_2: C10.2 Q9.3 R25.1 | length 10
  Top Layer w0.254: Q9.3 62.944,37.549 v1(66.53,37.549) ; C10.2 R25.1 66.215,39.406 v1(66.53,39.406)
  Bottom Layer w0.254: v1@66.53,37.511 v1(66.53,37.549) v1(66.53,39.406)
NetC14_2: C14.2 R32.2 R33.1 | length 4.8
  Top Layer w0.254: R32.2 56.22,20.475 56.22,17.986 R33.1 58.455,17.979 C14.2
NetC15_2: C15.2 R34.2 R35.1 | length 4.9
  Top Layer w0.254: R35.1 R34.2 56.229,12.861 C15.2
NetD2_1: D2.1 Q1.3 R3.1 | length 18.7
  Top Layer w0.254: v1(18.479,47.765) 20.181,47.765 20.654,47.292 R3.1
  Top Layer w0.305: Q1.3@22.66,46.682 Q1.3@22.71,46.682
  Top Layer w0.889: R3.1 Q1.3@22.66,46.682
  Bottom Layer w0.254: D2.1 7.74,54.538 14.513,47.765 v1(18.479,47.765)
NetD2_2: D2.2 R40.2 | length 22.6
  Top Layer w0.254: R40.2 0.088,49.556 v1(7.691,57.16)
  Bottom Layer w0.254: D2.2 7.691,56.089 v1(7.691,57.16)
NetD3_1: D3.1 Q2.3 R6.1 | length 22.7
  Top Layer w0.254: v1(15.814,43.939) 16.814,43.939 19.25,41.503 R6.1 R6.1@20.7,41.549
  Top Layer w0.889: R6.1@20.7,41.549 Q2.3@22.697,41.549
  Bottom Layer w0.254: D3.1 5.89,54.538 6.113,54.315 6.113,53.641 v1(15.814,43.939)
NetD3_2: D3.2 R45.2 | length 24
  Top Layer w0.254: R45.2 0.088,37.352 -0.759,38.199 -0.759,50.571 v1(5.766,57.096)
  Bottom Layer w0.254: v1(5.766,57.096) 5.766,56.062 D3.2
NetD4_1: D4.1 Q3.3 R9.1 | length 28.3
  Top Layer w0.254: v1(16.158,38.935) 18.769,36.324 R9.1
  Top Layer w0.889: R9.1 20.802,36.324 20.81,36.333 22.689,36.333 Q3.3
  Bottom Layer w0.254: D4.1 3.939,51.154 v1(16.158,38.935)
NetD4_2: D4.2 R46.2 | length 25.3
  Top Layer w0.254: R46.2 0.088,35.771 -1.323,37.182 -1.323,51.854 v1(3.922,57.099)
  Bottom Layer w0.254: v1(3.922,57.099) 3.922,56.055 D4.2
NetD5_1: D5.1 R22.2 S5.3 | length 53
  Top Layer w0.254: R22.2 v1(68.88,48.227)
  Bottom Layer w0.254: v1(68.88,48.227) 72.968,52.315 S5.3 91.662,52.315 94.072,54.725 D5.1
NetD5_2: D5.2 R23.1 | length 3.5
  Bottom Layer w0.254: R23.1 89.149,57.089 92.566,57.089 D5.2
NetD6_1: D6.1 Q4.3 R12.1 | length 35
  Top Layer w0.254: v1(14.745,33.802) 15.822,32.725 16.97,32.725 18.55,31.145 R12.1
  Top Layer w0.889: R12.1 Q4.3
  Bottom Layer w0.254: D6.1 2.088,46.458 v1(14.745,33.802)
NetD6_2: D6.2 R48.2 | length 26.5
  Top Layer w0.254: R48.2 0.088,34.189 -1.737,36.014 -1.737,53.449 1.911,57.096 2.086,57.096 v1(2.088,57.099)
  Bottom Layer w0.254: D6.2 v1(2.088,57.099)
NetD7_1: D7.1 Q5.3 R15.1 | length 41.3
  Top Layer w0.254: v1(14.895,29.263) 16.51,29.263 18.634,27.139 20.181,27.139 20.654,26.666 R15.1 R15.1@20.654,25.854
  Top Layer w0.889: R15.1 Q5.3
  Top Layer w0.905: R15.1@20.654,25.854 R15.1@20.802,25.707
  Bottom Layer w0.254: D7.1 0.238,44.756 6.304,38.69 6.339,38.69 14.895,30.134 v1(14.895,29.263)
NetD7_2: D7.2 R49.2 | length 27.7
  Top Layer w0.254: R49.2 0.088,32.607 -2.144,34.839 -2.144,54.868 0.088,57.099 0.092,57.094 v1(0.301,57.094)
  Bottom Layer w0.254: D7.2 0.301,56.101 v1(0.301,57.094)
NetD8_1: D8.1 Q6.3 R18.1 | length 47.7
  Top Layer w0.254: v1(14.821,24.009) 16.511,24.009 18.56,21.96 20.181,21.96 20.654,21.487 R18.1
  Top Layer w0.889: R18.1 Q6.3
  Bottom Layer w0.254: D8.1 -1.613,39.956 4.517,33.827 5.687,33.827 6.273,33.241 6.299,33.241 14.821,24.718 v1(14.821,24.009)
NetD8_2: D8.2 R50.2 | length 28.8
  Top Layer w0.254: v1(-1.613,57.099) -1.737,57.099 -2.586,56.251 -2.586,33.699 0.088,31.026 R50.2
  Bottom Layer w0.254: D8.2 v1(-1.613,57.099)
NetD9_1: D9.1 Q7.3 R21.1 | length 53
  Top Layer w0.254: v1(14.877,18.928) 16.303,17.501 17.159,17.501 19.052,15.608 R21.1
  Top Layer w0.889: R21.1 Q7.3
  Bottom Layer w0.254: D9.1 -3.464,36.204 13.813,18.928 v1(14.877,18.928)
NetD9_2: D9.2 R51.2 | length 30.5
  Top Layer w0.254: v1(-3.437,57.206) -3.195,56.964 -3.195,32.727 0.088,29.444 R51.2
  Bottom Layer w0.254: D9.2 -3.437,56.065 v1(-3.437,57.206)
NetP5_1: P5.1 P9.2 | length 3.2
  Top Layer w0.254: P9.2@76.2,31.53 P9.2
  Top Layer w2.794: P5.1 P9.2@76.2,31.53
NetP8_2: P8.2 P9.1 | length 3.7
  Top Layer w0.254: P8.2 P8.2@76.213,17.981 ; P9.1 P9.1@76.836,21.44
  Top Layer w2.794: P8.2@76.213,17.981 P9.1
NetQ1_2: Q1.1 R2.1 | length 2
  Top Layer w0.254: Q1.1@24.66,45.732 24.71,45.732 25.062,45.38 R2.1
NetQ2_2: Q2.1 R5.1 | length 2
  Top Layer w0.254: Q2.1@24.697,40.599 25.611,40.599 26.011,40.199 R5.1
NetQ3_2: Q3.1 R8.1 | length 1.5
  Top Layer w0.254: 25.171,35.126 26.374,35.126 R8.1
  Top Layer w0.305: R8.1 R8.1@26.481,35.118
NetQ4_2: Q4.1 R11.1 | length 2
  Top Layer w0.254: Q4.1@24.697,30.333 26.085,30.333 26.481,29.937 R11.1
NetQ5_2: Q5.1 R14.1 | length 1.8
  Top Layer w0.305: Q5.1@24.881,25.016 26.011,25.016 26.066,25.071 R14.1
NetQ6_2: Q6.1 R17.1 | length 2
  Top Layer w0.305: Q6.1@24.749,20.073 25.983,20.073 26.481,19.575 R17.1
NetQ7_2: Q7.1 R20.1 | length 2
  Top Layer w0.254: Q7.1 26.217,14.658 26.481,14.394 R20.1
NetR24_2: R24.2 U1.4 U1.6 U1.8 | length 10.1
  Top Layer w0.254: R24.2 41.438,45.55 42.813,44.176 42.813,43.622 42.443,43.251 42.443,42.899 U1.4 43.518,41.823 43.518,41.471 43.164,41.116 42.811,41.116 U1.6 41.544,42.383 41.173,42.383 40.912,42.122 40.912,41.601 U1.8
NetR26_2: R26.2 U1.16 U1.18 U1.20 | length 9.3
  Top Layer w0.254: R26.2 38.016,32.624 U1.20 40.506,35.113 40.506,35.565 40.343,35.728 39.717,35.728 ; U1.16 39.717,37.139 39.717,35.728 ; U1.18 39.103,35.113 39.717,35.728
NetR27_2: R27.2 U1.28 U1.30 | length 8.4
  Top Layer w0.254: R27.2 41.182,30.133 U1.28 42.627,31.566 42.089,31.028 42.089,30.251 42.273,30.067 42.53,30.067 U1.30
NetR30_1: R30.1 U1.57 | length 5.7
  Top Layer w0.254: U1.57 49.836,41.615 50.095,41.615 50.187,41.524 50.391,41.524 v1(50.439,41.476) ; v1(50.508,44.6) R30.1
  Bottom Layer w0.254: v1(50.439,41.476) 50.487,41.524 50.487,42.007 50.508,42.027 v1(50.508,44.6)
NetR30_2: R30.2 R31.1 U1.58 | length 8.4
  Top Layer w0.254: U1.58 49.657,42.143 v1(49.657,42.147) ; v1(49.654,46.955) 49.693,46.994 R30.2 51.989,46.994 R31.1
  Bottom Layer w0.254: v1(49.654,46.955) 49.654,42.149 v1(49.657,42.147)
NetR32_1: R32.1 U1.64 XFMR.6 | length 30.6
  Top Layer w0.254: v1(45.971,42.679) 45.971,42.712 46.681,43.422 U1.64 ; v1(48.439,20.466) 51.965,20.466 XFMR.6 R32.1
  Bottom Layer w0.254: v1(45.971,42.679) 45.971,22.933 v1(48.439,20.466)
NetR33_2: R33.2 U1.63 XFMR.7 | length 33.1
  Top Layer w0.254: v1(45.359,42.111) 45.401,42.07 46.114,42.07 47.046,43.002 U1.63 ; v1(47.849,19.876) 49.79,17.935 51.974,17.935 XFMR.7 52.018,17.979 R33.2
  Bottom Layer w0.254: v1(45.359,42.111) 45.359,22.365 v1(47.849,19.876)
NetS4_2: S4.2 U1.52 | length 48.1
  Top Layer w0.254: U1.52 50.947,39.179 51.432,39.664 52.301,40.533 53.182,40.533 v1(53.193,40.544) ; v1(53.203,38.819) 53.214,38.808 66.247,38.808 69.327,35.728 v1(85.806,35.728)
  Bottom Layer w0.254: v1(53.193,40.544) 53.203,40.534 v1@53.203,38.82 ; v1(85.806,35.728) 85.806,37.57 88.718,40.481 92.449,40.481 S4.2
S1: R20.2 U1.37 | length 37.8
  Top Layer w0.305: R20.2 27.981,14.29 28.011,14.261 31.636,14.261 33.083,15.707 33.083,18.581 36.058,21.556 50.149,21.556 v1(50.155,21.561) ; U1.37 48.128,31.578 50.203,29.502 50.155,29.454 v1(50.155,29.432)
  Bottom Layer w0.305: v1(50.155,21.561) v1(50.155,29.432)
S2: R17.2 U1.35 | length 30.9
  Top Layer w0.305: R17.2 27.981,19.458 28.179,19.261 32.403,19.261 35.255,22.113 v1(48.186,22.113) ; U1.35 v1(48.532,29.739)
  Bottom Layer w0.305: v1(48.186,22.113) 48.528,22.455 48.528,29.735 v1(48.532,29.739)
S3: R14.2 U1.33 | length 25.6
  Top Layer w0.305: R14.2 27.981,24.603 47.551,24.603 v1(47.604,24.656) ; U1.33 47.504,29.352 v1(47.604,29.352)
  Bottom Layer w0.305: v1(47.604,24.656) v1(47.604,29.352)
S6: R11.2 U1.25 | length 20.4
  Top Layer w0.305: R11.2 27.981,29.759 32.969,29.759 v1(33.047,29.837) ; v1(33.047,27.52) 40.334,27.52 40.371,27.557 v1(40.371,27.566) ; v1(40.338,31.057) 40.338,31.41 U1.25
  Bottom Layer w0.305: v1(33.047,27.52) v1(33.047,29.837) ; v1(40.338,31.057) 40.371,31.024 v1(40.371,27.566)
S7: R8.2 U1.23 | length 14.3
  Top Layer w0.305: R8.2 27.981,34.915 36.147,34.915 37.087,33.976 v1(37.13,34.019) ; v1(39.357,32.535) 39.396,32.574 39.943,32.574 40.07,32.701 40.19,32.701 40.438,32.949 40.463,32.949 U1.23
  Bottom Layer w0.305: v1(37.13,34.019) 38.613,32.535 v1(39.357,32.535)
S11: R5.2 U1.13 | length 12.3
  Top Layer w0.305: R5.2 27.981,40.071 38.906,40.071 U1.13
S12: R2.2 U1.11 | length 17
  Top Layer w0.305: R2.2 27.981,45.228 v1(38.641,45.228) ; v1(38.651,41.69) 38.702,41.69 U1.11
  Bottom Layer w0.305: v1(38.641,45.228) 38.641,41.7 v1(38.651,41.69)
SCK: R34.1 U1.62 XFMR.9 | length 38
  Top Layer w0.254: v1(44.775,41.488) 44.823,41.536 45.082,41.536 45.125,41.58 46.265,41.58 U1.62 ; v1(47.245,19.272) 47.245,16.805 49.596,14.454 49.79,14.261 50.804,13.246 51.598,13.246 XFMR.9 R34.1
  Bottom Layer w0.254: v1(44.775,41.488) 44.775,21.709 47.212,19.272 v1(47.245,19.272)
SDI: U1.53
SDO: U1.54
VCC: BT1.1 J5.1 P6.1 P6.2 P7.1 P7.2 P10.1 P10.2 P11.1 P11.2 P12.8 Q1.2 R1.1 R24.1 R25.2 S5.2 | length 49.4
  Top Layer w0.254: Q1.2 25.408,47.632 25.746,47.97 R1.1 ; 38.641,49.789 38.699,49.73 v1(38.699,48.209) ; v1(38.738,46.123) 39.34,46.123 39.59,45.873 39.69,45.873 39.913,45.65 R24.1 ; R25.2 v1(68.61,40.361) ; v1(68.636,46.573) 69.787,46.573 73.449,50.235
  Top Layer w0.889: P12.8 4.138,42.74 11.392,49.995 ; 23.138,51.566 24.692,50.013 24.692,47.638 Q1.2
  Bottom Layer w0.254: v1(38.699,48.209) 38.699,46.162 v1(38.738,46.123) ; v1(68.61,40.361) 68.636,40.387 v1(68.636,46.573) ; v1(79.632,50.341) 79.709,50.341 79.736,50.315 S5.2
VREF1: C12.2 U1.51 | length 3.6
  Top Layer w0.254: U1.51 52.279,39.815 53.664,39.815 C12.2
VREF2: C13.2 R41.1 R42.1 R43.1 R44.1 U1.50 | length 70.1
  Top Layer w0.254: U1.50 50.825,37.655 50.825,37.252 51.326,36.752 C13.2 53.936,35.565 v1(53.81,35.439) ; v1(53.861,22.515) 69.744,22.515 70.129,22.9 85.552,22.9 R44.1 R43.1 v1(85.566,15.66) ; v1(85.56,11.666) 85.563,11.669 85.563,12.722 R42.1 ; v1(85.566,6.305) R41.1
  Bottom Layer w0.254: v1(53.81,35.439) 53.81,22.515 v1(53.861,22.515) ; v1(85.566,6.305) 85.566,11.66 v1(85.56,11.666) 85.56,15.653 v1(85.566,15.66)
VREG: C11.2 Q9.1 S4.3 U1.48 U1.55 | length 57.3
  Top Layer w0.254: U1.55 49.875,40.228 49.337,39.69 49.337,37.677 49.994,37.02 50.443,37.02 U1.48 52.556,34.907 55.983,34.907 56.797,35.72 56.797,35.728 ; v1(56.797,36.175) 56.797,35.728 ; v1(57.013,39.386) 57.017,39.382 58.743,39.382 59.722,40.361 C11.2 ; v1(57.44,33.612) 85.043,33.612 v1(85.053,33.602) ; Q9.1 56.797,35.728
  Bottom Layer w0.254: v1(57.013,39.386) 56.797,39.17 v1(56.797,36.175) 56.797,34.255 v1(57.44,33.612) ; v1(85.053,33.602) 87.952,36.501 87.952,37.444 88.46,37.952 S4.3
WDT: P12.9 U1.56 | length 56.9
  Top Layer w0.254: P12.9 6.678,39.87 15.288,48.48 22.733,48.48 23.393,47.82 23.393,47.691 24.284,46.801 27.054,46.801 27.296,47.043 27.296,48.551 27.445,48.7 32.862,48.7 34.453,47.108 41.093,47.108 41.651,46.55 v1(48.311,46.55) ; v1(48.651,39.721) 49.521,40.591 U1.56
  Bottom Layer w0.254: v1(48.311,46.55) 48.311,40.061 v1(48.651,39.721)
pads on no net: P12.10 P12.11 S5.1 S5.P$1 S5.P$2 U1.2 U1.3 U1.5 U1.7 U1.9 U1.14 U1.15 U1.17 U1.19 U1.21 U1.26 U1.27 U1.29 U1.31 XFMR.3 XFMR.8

## Polygon pours and split planes (outlines as drawn)
GND on Top Layer "Top Layer-GND" (solid, pour order 16): 93.942,46.274 70.457,46.274 ccw(c70.457,45.017) 69.2,45.017 69.2,37.509 ccw(c70.387,37.509) 70.387,36.322 94.336,36.322 ccw(c94.336,37.437) 95.451,37.439 95.435,44.785 ccw(c93.942,44.781)
VCC on Top Layer "Top Layer-VCC" (solid, pour order 0): 8.666,64.936 8.666,51.016 ccw(c10.76,51.016) 10.76,48.923 68.66,48.923 cw(c68.66,43.632) 72.401,47.373 ccw(c75.054,50.026) 75.054,46.274 94.323,46.274 ccw(c94.323,47.384) 95.433,47.384 95.433,54.795 ccw(c94.57,54.795) 94.57,55.659 29.838,55.659 cw(c29.838,58.443) 27.054,58.443 27.054,64.476 ccw(c25.207,64.476) 25.21,66.323 10.083,66.351 ccw(c10.081,64.936)
GND on Top Layer "Top Layer-GND 1" (solid, pour order 14): 65.954,-4.8 82.733,-4.8 ccw(c82.733,-3.155) 84.379,-3.155 84.379,11.527 ccw(c83.099,11.527) 83.099,12.807 65.962,12.805 ccw(c65.963,11.584) 64.742,11.584 64.742,-3.588 ccw(c65.954,-3.588)
GND on Bottom Layer "Bottom Layer-GND" (solid, pour order 24): 84.364,-3.559 84.364,44.573 ccw(c82.652,44.573) 82.652,46.284 70.686,46.284 ccw(c70.685,44.778) 69.179,44.778 69.179,38.029 69.176,14.581 cw(c67.447,14.581) 67.447,12.852 66.065,12.852 ccw(c66.065,11.529) 64.742,11.529 64.742,-3.431 ccw(c66.111,-3.431) 66.111,-4.8 83.122,-4.8 ccw(c83.122,-3.559)

## Keep-outs
Keep-Out Layer:
  the board outline again, w0.1

## Silkscreen, mask and mechanical layers (free items; w line width, h text height)
Top Overlay:
  drawing of 58 lines, arcs and shapes, not listed
  text "B3" at 53.685,53.854 h1.78
  text "B1" at 68.102,53.628 h1.78
  text "B5" at 37.986,53.6 h1.78
  text "B+" at 16.632,53.556 h1.78
  text "P+" at 77.272,49.24 h1.78 r90
  text "P-" at 77.672,40.011 h1.78 r90
  text "4501-WB-AV-BMS / REV. A / NOV. 2019 / Pablo F." at 31.333,20.069 h0.64
  text "B2" at 53.861,6.16 h1.78
  text "B4" at 35.545,6.112 h1.78
  text "B-" at 69.992,6.066 h1.78
  text "B6" at 17.015,6.02 h1.78
Bottom Overlay:
  text "B+" at 27.048,64.176 h1.78
  text "B5" at 45.89,64.176 h1.78
  text "B3" at 64.315,63.981 h1.78
  text "B1" at 81.945,63.706 h1.78
  text "On" at 91.653,56.799 h0.64
  text "B1" at -3.814,52.729 h0.64 r270
  text "B2" at -1.963,52.729 h0.64 r270
  text "B3" at 0,52.729 h0.64 r270
  text "B4" at 1.81,52.729 h0.64 r270
  text "B5" at 3.589,52.729 h0.64 r270
  text "B6" at 5.44,52.729 h0.64 r270
  text "B7" at 7.363,52.729 h0.64 r270
  text "9" at 93.35,36.282 h0.64 r90
  text "8" at 93.35,33.793 h0.64 r90
  text "7" at 93.35,31.141 h0.64 r90
  text "6" at 93.35,28.652 h0.64 r90
  text "5" at 93.35,26.092 h0.64 r90
  text "4" at 93.35,23.491 h0.64 r90
  text "GND" at 93.35,21.004 h0.64 r90
  text "3" at 93.35,18.566 h0.64 r90
  text "GND" at 93.35,15.881 h0.64 r90
  text "2" at 93.35,12.87 h0.64 r90
  text "GND" at 93.35,10.735 h0.64 r90
  text "1" at 93.35,7.625 h0.64 r90
  text "GND" at 93.35,5.933 h0.64 r90
  text "B-" at 81.579,-2.342 h1.78 r180
  text "B6" at 27.358,-3.68 h1.78
  text "B4" at 45.72,-3.825 h1.78
  text "B2" at 64.13,-4.03 h1.78

## Text inside footprints (layer, text, board x,y; h text height)
U1: Top Overlay "*" at 42.271,44.245 h1.27 r315; Mechanical 13 "*" at 44.256,42.663 h1.27 r315